# Allegro board ECBMOTORA_VER_B_Allegro.brd
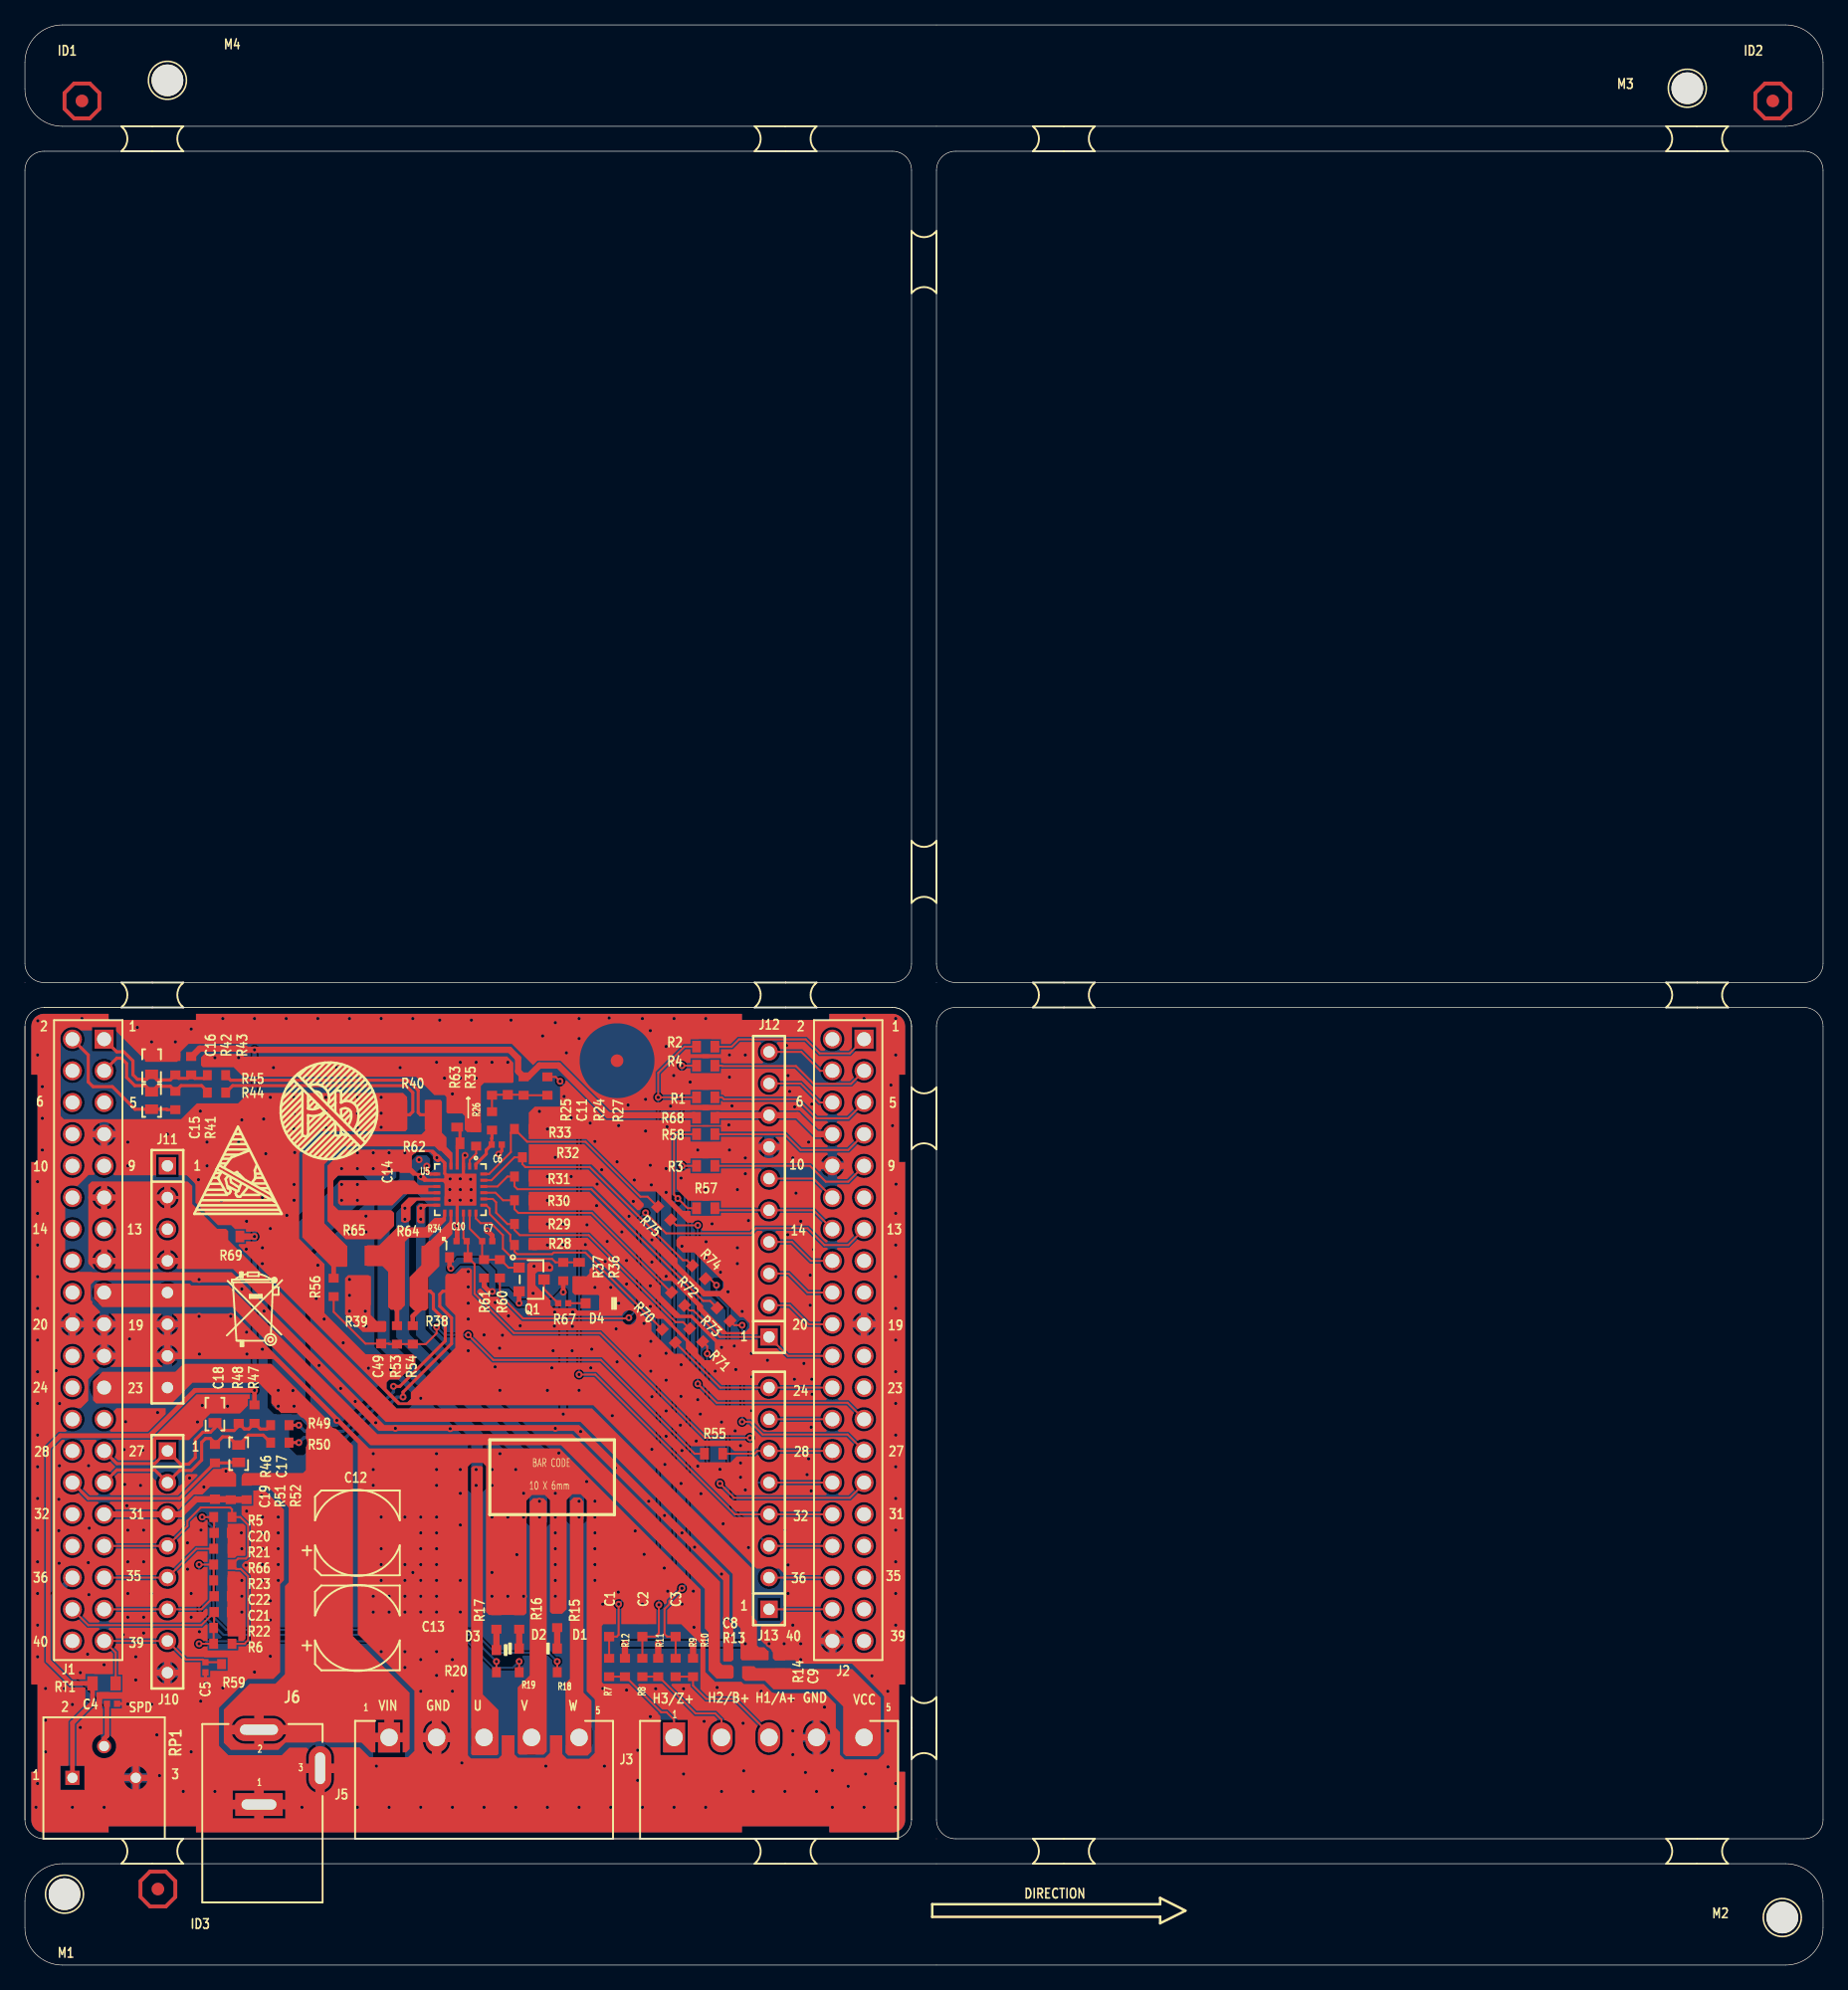
[diagram p0: board, top side]
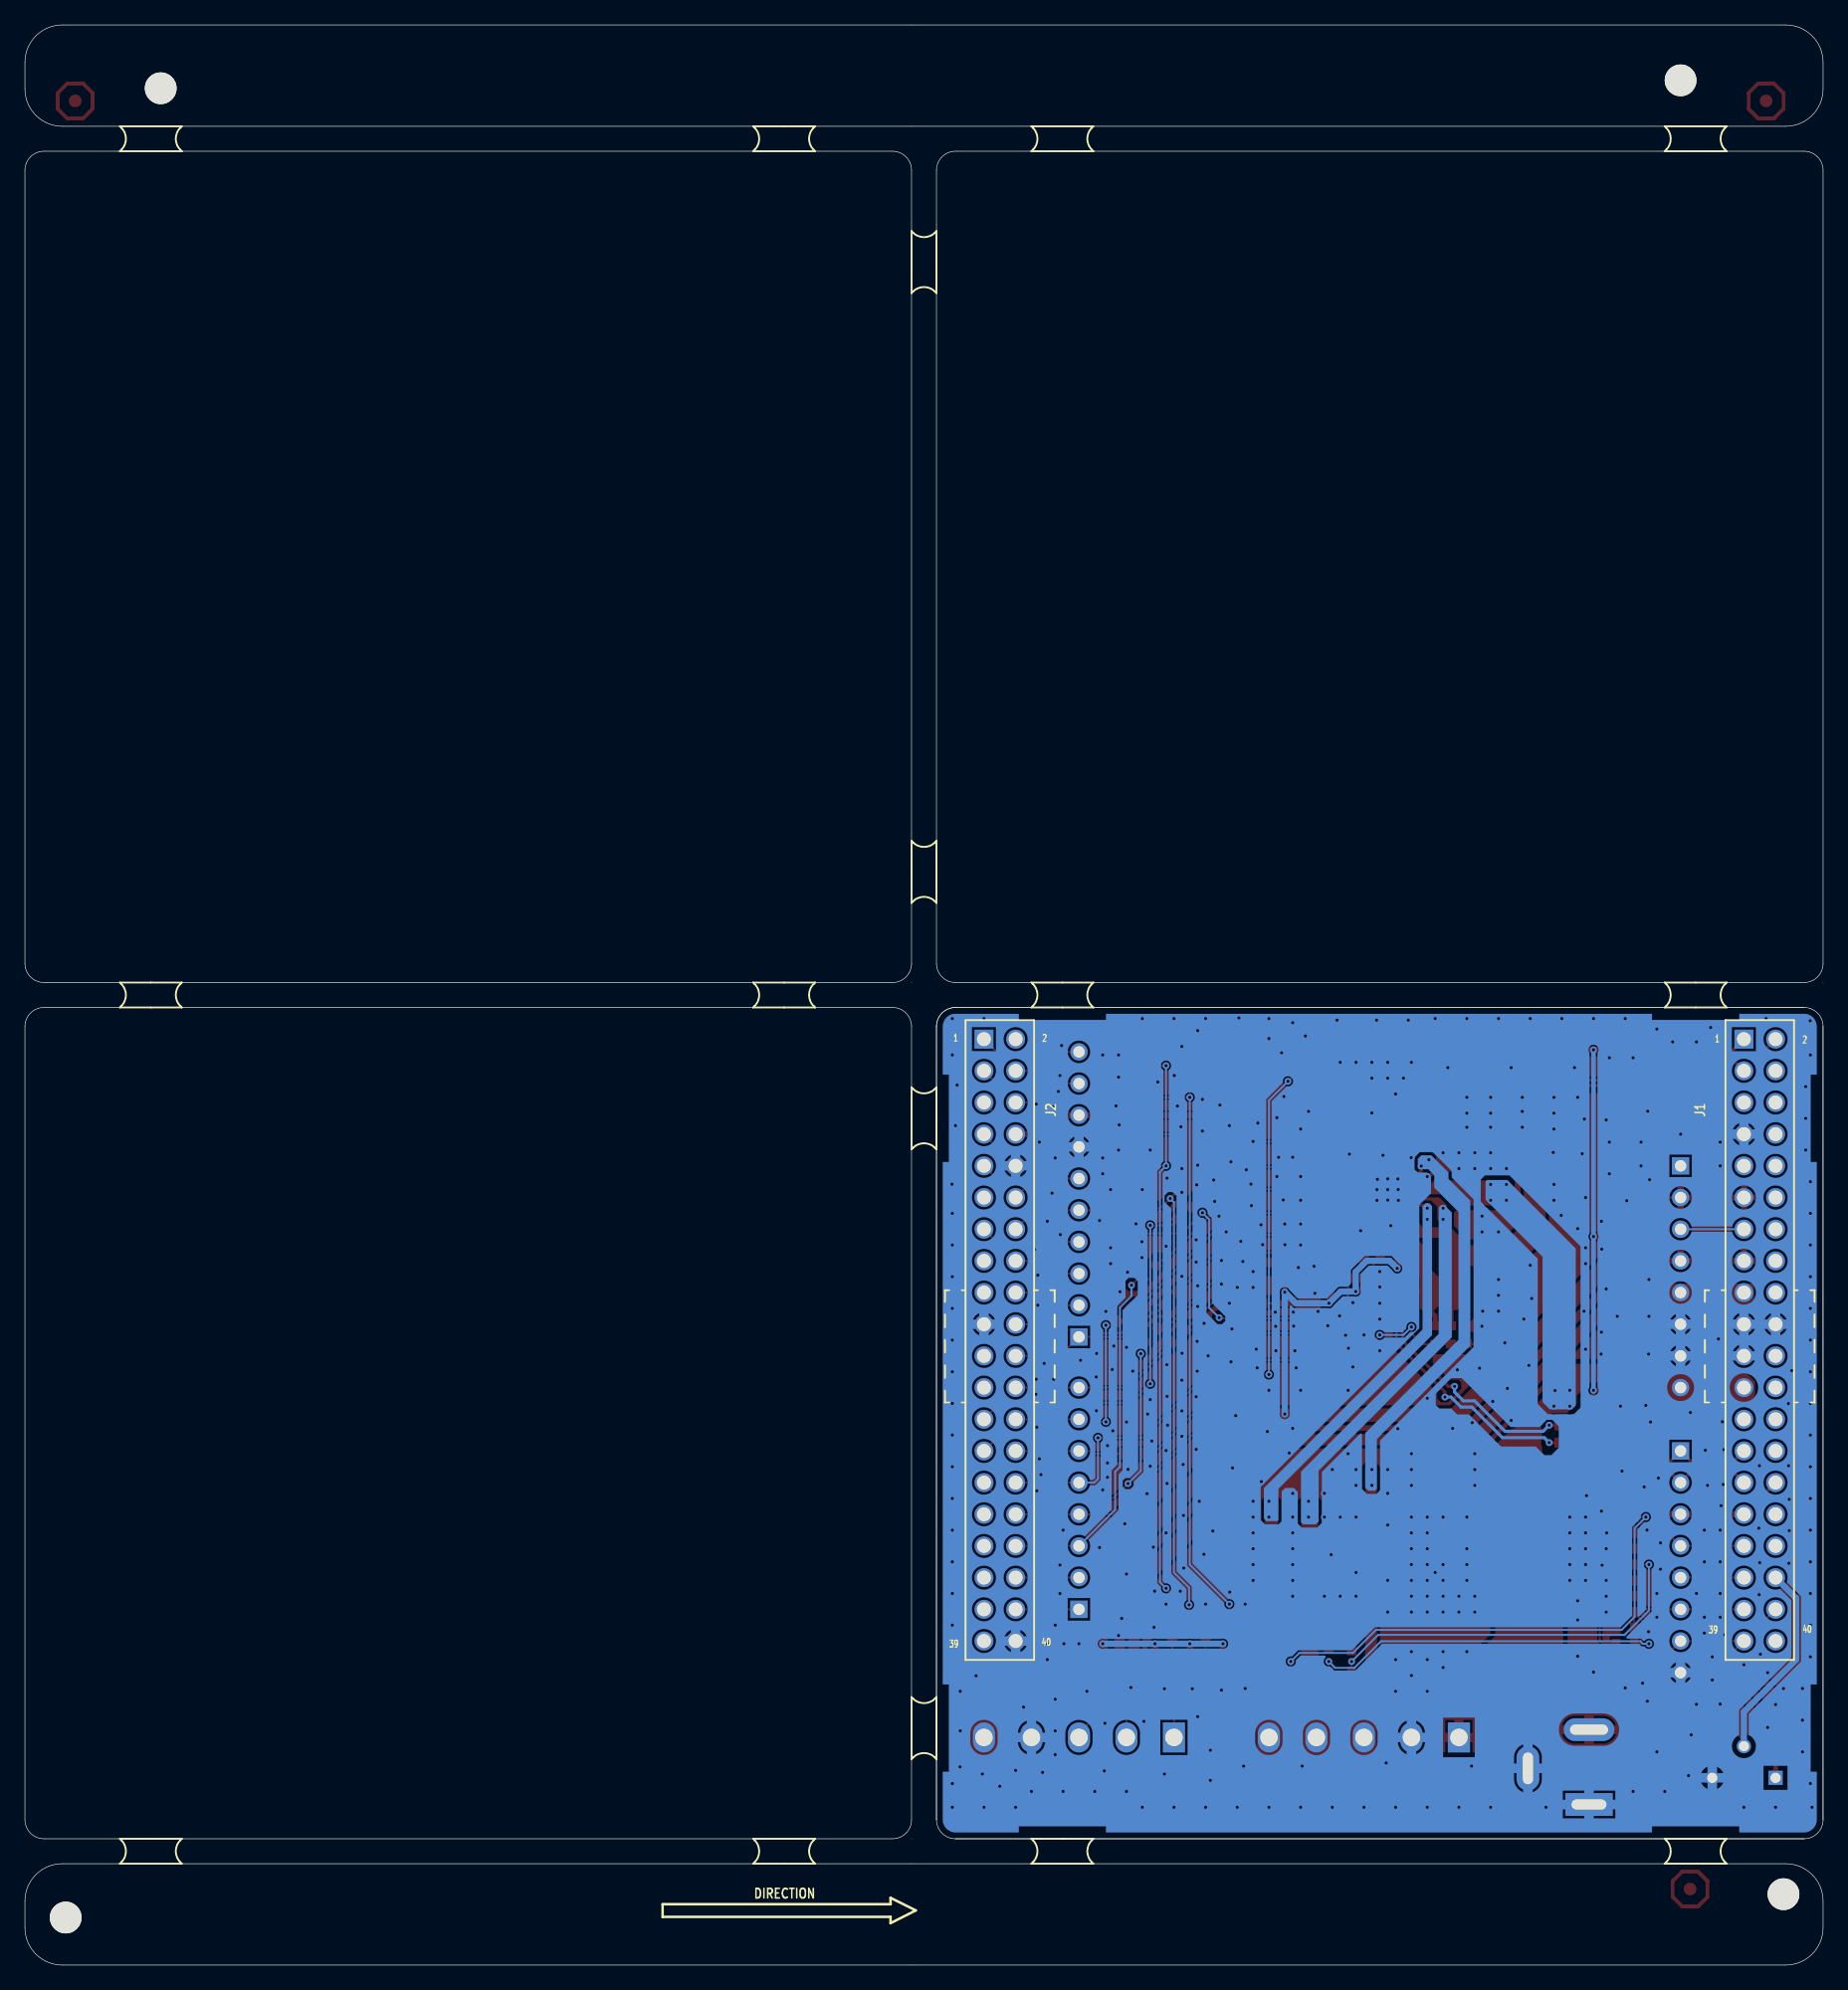
[diagram p1: board, bottom side, seen from below]

Outline 144.24 x 155.57 mm; copper layers: TOP, BOTTOM. Coordinates in mm from the lower left corner of the outline.
Outline path: 0,75.26 0,11.65 ; 0,75.26 arc(0.45,76.34) 1.52,76.79 ; 0,75.26 0,11.65 ; 0,11.65 arc(0.45,10.57) 1.52,10.13 ; 1.52,76.79 69.6,76.79 ; 1.52,76.79 69.6,76.79 ; 69.6,76.79 arc(70.67,76.34) 71.12,75.26 ; 69.6,76.79 arc(70.67,76.34) 71.12,75.26 ; 1.52,10.13 69.6,10.13 ; 1.52,10.13 69.6,10.13 ; 69.6,10.13 arc(70.67,10.57) 71.12,11.65 ; 71.12,75.26 71.12,11.65 ; 71.12,75.26 71.12,11.65 ; 0,152.58 arc(0.88,154.69) 3,155.57 141.24,155.57 arc(143.36,154.69) 144.24,152.58 144.24,150.44 arc(143.36,148.32) 141.24,147.44 3,147.44 arc(0.88,148.32) 0,150.44 0,152.58 ; 0,143.92 0,80.31 arc(0.45,79.23) 1.52,78.79 69.6,78.79 arc(70.67,79.23) 71.12,80.31 71.12,143.92 arc(70.67,145) 69.6,145.44 1.52,145.44 arc(0.45,145) 0,143.92 ; 0,5.13 arc(0.88,7.25) 3,8.13 141.24,8.13 arc(143.36,7.25) 144.24,5.13 144.24,3 arc(143.36,0.88) 141.24,0 3,0 arc(0.88,0.88) 0,3 0,5.13 ; 73.12,143.92 73.12,80.31 arc(73.57,79.23) 74.64,78.79 142.72,78.79 arc(143.79,79.23) 144.24,80.31 144.24,143.92 arc(143.79,145) 142.72,145.44 74.64,145.44 arc(73.57,145) 73.12,143.92 ; 73.12,75.26 73.12,11.65 arc(73.57,10.57) 74.64,10.13 142.72,10.13 arc(143.79,10.57) 144.24,11.65 144.24,75.26 arc(143.79,76.34) 142.72,76.79 74.64,76.79 arc(73.57,76.34) 73.12,75.26

## Design rules (mm)
net group DIFFPAIR0: nets PGA0IN_N0 PGA0IN_P0
net group DIFFPAIR1: nets PGA1IN_N3 PGA1IN_P3
net group POWER: nets 3V3 GND

## Placement (name value [footprint] x y rotation side)
C1  330pF  [SC0603-TD]  46.86 27.03 90 top
C2  330pF  [SC0603-TD]  49.53 27.03 90 top
C3  330pF  [SC0603-TD]  52.2 27.03 90 top
C4  1nF  [SC0402-PA]  6.99 20.95 0 top
C5  1nF  [SC0402-PA]  14.48 23.88 270 top
C6  1nF  [SC0402-PA]  37.85 65.79 180 top
C7  10nF  [SC0402-PB]  37.08 58.05 0 top
C8  100nF  [SC0603-TC]  57.15 24.88 0 top
C9  220nF  [SC0603-TC]  60.58 24.11 90 top
C10  1nF  [SC0402-PA]  35.03 58.05 0 top
C11  100pF  [SC0603-TC]  38.73 70.48 90 top
C12  47uF/NC  [SCAPC2-0606]  26.67 34.65 0 top
C13  47uF  [SCAPC2-0606]  26.67 27.03 0 top
C14  330nF  [SC0603-TC]  30.48 63.23 90 top
C15  47pF  [SC0603-PA]  10.16 69.33 270 top
C16  47pF/NC  [SC0603-PA]  10.16 72.12 270 top
C17  47pF  [SC0603-PA]  17.14 41 90 top
C18  47pF/NC  [SC0603-PA]  15.24 44.18 90 top
C19  220nF  [SC0603-TC]  15.24 38.05 90 top
C20  100pF/NC  [SC0603-TC]  15.88 34.65 0 top
C21  100pF/NC  [SC0603-TC]  15.88 28.3 0 top
C22  100pF/NC  [SC0603-TC]  15.88 29.57 0 top
C49  100pF  [SC0603-TC]  28.57 50.53 90 top
D1  LED_GREEN/0603  [HSD0603-LED]  43.43 25.38 180 top
D2  LED_GREEN/0603  [HSD0603-LED]  40.39 25.38 180 top
D3  LED_GREEN/0603  [HSD0603-LED]  37.08 25.26 0 top
D4  LED  [SD0603-LED-A]  45.72 53.07 0 top
ID1  PCB-MARKPOINT  [ID-BOARD]  4.57 149.48 0 top
ID2  PCB-MARKPOINT  [ID-BOARD]  140.21 149.48 0 top
ID3  PCB-MARKPOINT  [ID-BOARD]  10.67 6.1 0 top
J1  86-105-04002-1  [RHEAD0220-100-100T-D]  5.08 50.12 270 bottom
J2  86-105-04002-1  [RHEAD0220-100-100T-D]  66.04 50.12 270 bottom
J3  NC  [TB5-150S-C]  52.07 18.25 0 top
J5  NC  [TB5-150S-C]  29.21 18.25 0 top
J6  DC-006-HW  [PWC0103-M-N]  18.78 12.88 270 top
J10  NC  [SIP-8P]  11.43 32.34 270 top
J11  NC  [SIP-8P]  11.43 55.2 270 top
J12  NC  [SIP-10P]  59.69 61.8 90 top
J13  NC  [SIP-8P]  59.69 37.42 90 top
M1  RIVET-HOLE100-R2R5  [HOLE100]  3.17 5.68 0 top
M2  RIVET-HOLE100-R2R5  [HOLE100]  140.97 3.81 0 top
M3  RIVET-HOLE100-R2R5  [HOLE100]  133.35 150.5 0 top
M4  RIVET-HOLE100-R2R5  [HOLE100]  11.43 151.13 0 top
NOREF  -  [unnamed]  10.22 146.44 0 top
NOREF#2  -  [unnamed]  83.34 77.79 0 top
NOREF#3  -  [#2]  0 10.13 90 top
NOREF#4  -  [unnamed]  10.22 77.79 0 top
NOREF#5  -  [#2]  42.29 39.12 0 top
NOREF#6  -  [unnamed]  72.12 87.66 90 top
NOREF#7  -  [unnamed]  72.12 19 90 top
NOREF#8  -  [unnamed]  134.14 146.44 0 top
NOREF#9  -  [#2]  24.39 68.5 0 top
NOREF#10  -  [#2]  20.95 52.7 0 top
NOREF#11  -  [unnamed]  134.14 9.13 0 top
NOREF#12  -  [unnamed]  83.34 146.44 0 top
NOREF#13  -  [unnamed]  134.14 77.79 0 top
NOREF#14  -  [unnamed]  10.22 9.13 0 top
NOREF#15  -  [#2]  3 0 90 top
NOREF#16  -  [unnamed]  61.02 9.13 0 top
NOREF#17  -  [#2]  16.4 63.23 0 top
NOREF#18  -  [#2]  0 11.65 0 top
NOREF#19  -  [unnamed]  72.12 136.55 90 top
NOREF#20  -  [unnamed#3]  47.5 72.52 0 top
NOREF#21  -  [unnamed]  83.34 9.13 0 top
NOREF#22  -  [#2]  0 10.13 0 top
NOREF#23  -  [unnamed]  61.02 146.44 0 top
NOREF#24  -  [unnamed]  61.02 77.79 0 top
NOREF#25  -  [#2]  82.93 4.37 0 top
NOREF#26  -  [unnamed]  72.12 67.9 90 top
Q1  PMOS-GSD  [SOT23-3B]  40.64 54.97 270 top
R1  0/NC  [SR0603B]  54.61 69.58 180 top
R2  0  [SR0603B]  54.61 73.64 180 top
R3  0/NC  [SR0603B]  54.61 64.09 180 top
R4  0  [SR0603B]  54.61 72.12 180 top
R5  10k/NC  [SR0603]  15.88 35.92 180 top
R6  10k/NC  [SR0603]  15.88 25.76 180 top
R7  33  [SR0603]  46.86 23.86 270 top
R8  33  [SR0603]  49.53 23.86 270 top
R9  33  [SR0603]  52.2 23.86 270 top
R10  10k  [SR0603]  53.59 23.86 90 top
R11  10k  [SR0603]  50.8 23.86 90 top
R12  10k  [SR0603]  48.13 23.86 90 top
R13  0  [SR0603B]  57.15 23.48 0 top
R14  0/NC  [SR0603B]  59.18 24.11 270 top
R15  10k  [SR0603]  42.7 27.8 90 top
R16  10k  [SR0603]  39.65 27.67 90 top
R17  10k  [SR0603]  37.82 27.67 90 top
R18  10k  [SR0603]  43.43 23.48 0 top
R19  10k  [SR0603]  40.39 23.48 0 top
R20  10k  [SR0603]  37.08 23.48 180 top
R21  1k  [SR0603-TB]  15.88 33.38 0 top
R22  1k  [SR0603-TB]  15.88 27.03 0 top
R23  1k  [SR0603-TB]  15.88 30.84 0 top
R24  20k  [SR0603-TC]  40.01 70.48 270 top
R25  1.3k  [SR0603-TB]  37.47 70.48 90 top
R26  10k  [SR0603]  37.47 67.69 270 top
R27  3.3k  [SR0603-TC]  41.91 70.48 90 top
R28  39k  [SR0603-TB]  40.01 57.74 0 top
R29  39k  [SR0603-TB]  40.01 59.42 0 top
R30  39k  [SR0603-TB]  40.01 61.32 0 top
R31  39k  [SR0603-TB]  40.01 63.23 0 top
R32  39k  [SR0603-TB]  40.64 64.77 0 top
R33  39k  [SR0603-TB]  40.01 67.04 0 top
R34  10k  [SR0603]  34.8 56.75 0 top
R35  10k  [SR0603]  36.2 66.4 270 top
R36  0/NC  [SR0603B]  44.45 55.61 270 top
R37  39k  [SR0603-TB]  43.18 55.61 90 top
R38  200m  [SR1210-TF]  33.02 54.09 0 top
R39  200m  [SR1210-TF]  28.45 54.09 180 top
R40  200m  [SR1210-TF]  31.37 68.18 180 top
R41  10k  [SR0603]  12.06 69.33 270 top
R42  20k  [SR0603-TC]  12.06 72.12 270 top
R43  20k  [SR0603-TC]  13.34 72.12 90 top
R44  3.3k  [SR0603-TC]  15.37 69.96 180 top
R45  3.3k  [SR0603-TC]  15.37 71.36 180 top
R46  10k  [SR0603]  15.24 41 90 top
R47  20k  [SR0603-TC]  18.41 44.18 270 top
R48  20k  [SR0603-TC]  17.14 44.18 90 top
R49  3.3k  [SR0603-TC]  20.45 43.29 0 top
R50  3.3k  [SR0603-TC]  20.45 41.89 0 top
R51  12k  [SR0603-TB]  16.51 38.05 90 top
R52  180k  [SR0603-TB]  17.78 38.05 270 top
R53  3.3k  [SR0603-TC]  29.84 50.53 270 top
R54  3.3k  [SR0603-TC]  31.11 50.53 270 top
R55  100  [SR0603B]  55.24 41 0 top
R56  3.3k  [SR0603-TC]  24.77 54.34 270 top
R57  0  [SR0603B]  54.61 60.69 180 top
R58  0/NC  [SR0603B]  54.61 66.63 180 top
R59  10k  [SR0603]  16.51 24.13 0 top
R60  1k  [SR0603-TB]  38.1 55.83 270 top
R61  39k  [SR0603-TB]  36.83 55.83 90 top
R62  0/NC  [SR0603B]  34.16 65.9 180 top
R63  0  [SR0603B]  34.67 67.93 90 top
R64  0/NC  [SR1206-TD]  31.11 56.88 180 top
R65  0/NC  [SR1206-TD]  26.54 56.88 180 top
R66  10k/NC  [SR0603]  15.88 32.11 180 top
R67  330  [SR0402]  43.18 53.07 0 top
R68  0/NC  [SR0603B]  54.61 67.94 180 top
R69  0  [SR0603B]  16.51 58.42 0 top
R70  100  [SR0603]  51.65 50.44 135 top
R71  100  [SR0603]  53.84 50.51 135 top
R72  100  [SR0603]  52.39 53.42 135 top
R73  100  [SR0603]  56.04 52.17 135 top
R74  100  [SR0603]  54.06 55.56 135 top
R75  100  [SR0603]  51.28 60.28 135 top
RP1  10K  [RES3-100B-III]  3.81 15.01 180 top
RT1  47k  [SR0805-TD]  6.35 22.59 0 top
U5  STSPIN830  [MLF24B-050-0404L]  34.92 62.18 180 top

## Library data of the parts
C1-C3 = SC0603-TD
C4-C6 C10 = SC0402-PA
C7 = SC0402-PB
C8 C9 C11 C14 C19-C22 C49 = SC0603-TC
C12 C13 = SCAPC2-0606
C15-C18 = SC0603-PA
D1-D3 = HSD0603-LED
D4 = SD0603-LED-A
ID1-ID3 = ID-BOARD
J1 J2 = RHEAD0220-100-100T-D
J3 J5 = TB5-150S-C
J6 = PWC0103-M-N
J10 J11 J13 = SIP-8P
J12 = SIP-10P
M1-M4 = HOLE100
Q1 = SOT23-3B
R1-R4 R13 R14 R36 R55 R57 R58 R62 R63 R68 R69 = SR0603B
R5-R12 R15-R20 R26 R34 R35 R41 R46 R59 R66 R70-R75 = SR0603
R21-R23 R25 R28-R33 R37 R51 R52 R60 R61 = SR0603-TB
R24 R27 R42 R43 R45 R47-R50 R53 R54 R56 = SR0603-TC
R38-R40 = SR1210-TF
R44 = SR0603-TC: signal model: SR0201_33
R64 R65 = SR1206-TD
R67 = SR0402
RP1 = RES3-100B-III
RT1 = SR0805-TD
U5 = MLF24B-050-0404L

## Footprints (pads in the part's own frame, mm; a bottom-side part is the same pattern mirrored in y, then rotated)
HOLE100
  round 2.54 hole 2.54 unplated: (0,0)
HSD0603-LED
  rect 0.762x0.813 smd: 1(-0.737,0) 2(0.737,0)
ID-BOARD
  round 1.016 smd: 1(0,0)
MLF24B-050-0404L
  rect 0.254x0.559 smd: 1(-1.25,-1.879) 2(-0.75,-1.879) 3(-0.25,-1.879) 4(0.25,-1.879) 5(0.75,-1.879) 6(1.25,-1.879) 13(1.25,1.879) 14(0.75,1.879) 15(0.25,1.879) 16(-0.25,1.879) 17(-0.75,1.879) 18(-1.25,1.879)
  rect 0.559x0.254 smd: 7(1.879,-1.25) 8(1.879,-0.75) 9(1.879,-0.25) 10(1.879,0.25) 11(1.879,0.75) 12(1.879,1.25) 19(-1.879,1.25) 20(-1.879,0.75) 21(-1.879,0.25) 22(-1.879,-0.25) 23(-1.879,-0.75) 24(-1.879,-1.25)
  rect 2.54x2.54 smd: 25(0,0)
PWC0103-M-N
  rect 1.829x3.81 hole 0.813x2.794: 1(0,0)
  oval 1.829x4.064 hole 0.813x3.048: 2(-6,0)
  oval 3.556x1.829 hole 2.54x0.813: 3(-2.9,4.9)
RES3-100B-III
  rect 1.143x1.143 hole 0.813: 1(0,0)
  round 1.143 hole 0.813: 2(-2.54,-2.54) 3(-5.08,0)
RHEAD0220-100-100T-D
  rect 1.524x1.524 hole 1.118: 1(-24.13,-1.27)
  round 1.524 hole 1.118: 2(-24.13,1.27) 3(-21.59,-1.27) 4(-21.59,1.27) 5(-19.05,-1.27) 6(-19.05,1.27) 7(-16.51,-1.27) 8(-16.51,1.27) 9(-13.97,-1.27) 10(-13.97,1.27) 11(-11.43,-1.27) 12(-11.43,1.27) 13(-8.89,-1.27) 14(-8.89,1.27) 15(-6.35,-1.27) 16(-6.35,1.27) 17(-3.81,-1.27) 18(-3.81,1.27) 19(-1.27,-1.27) 20(-1.27,1.27) 21(1.27,-1.27) 22(1.27,1.27) 23(3.81,-1.27) 24(3.81,1.27) 25(6.35,-1.27) 26(6.35,1.27) 27(8.89,-1.27) 28(8.89,1.27) 29(11.43,-1.27) 30(11.43,1.27) 31(13.97,-1.27) 32(13.97,1.27) 33(16.51,-1.27) 34(16.51,1.27) 35(19.05,-1.27) 36(19.05,1.27) 37(21.59,-1.27) 38(21.59,1.27) 39(24.13,-1.27) 40(24.13,1.27)
SC0402-PA
  rect 0.508x0.508 smd: 1(-0.406,0) 2(0.406,0)
SC0402-PB
  rect 0.508x0.508 smd: 1(-0.406,0) 2(0.406,0)
SC0603-PA
  rect 0.762x1.041 smd: 1(-0.699,0) 2(0.699,0)
SC0603-TC
  rect 0.762x0.813 smd: 1(-0.699,0) 2(0.699,0)
SC0603-TD
  rect 0.762x0.813 smd: 1(-0.699,0) 2(0.699,0)
SCAPC2-0606
  rect 3.302x1.397 smd: 1(-2.651,0) 2(2.651,0)
SD0603-LED-A
  rect 0.813x0.813 smd: 1(-0.75,0) 2(0.75,0)
SIP-8P
  rect 1.397x1.397 hole 0.914: 1(-8.89,0)
  round 1.397 hole 0.914: 2(-6.35,0) 3(-3.81,0) 4(-1.27,0) 5(1.27,0) 6(3.81,0) 7(6.35,0) 8(8.89,0)
SIP-10P
  rect 1.397x1.397 hole 0.914: 1(-11.43,0)
  round 1.397 hole 0.914: 2(-8.89,0) 3(-6.35,0) 4(-3.81,0) 5(-1.27,0) 6(1.27,0) 7(3.81,0) 8(6.35,0) 9(8.89,0) 10(11.43,0)
SOT23-3B
  rect 0.813x0.914 smd: 1(-0.95,-1) 2(0.95,-1) 3(0,1)
SR0402
  rect 0.508x0.508 smd: 1(-0.406,0) 2(0.406,0)
SR0603
  rect 0.711x0.813 smd: 1(-0.737,0) 2(0.737,0)
SR0603-TB
  rect 0.711x0.813 smd: 1(-0.737,0) 2(0.737,0)
SR0603-TC
  rect 0.711x0.813 smd: 1(-0.737,0) 2(0.737,0)
SR0603B
  rect 0.711x0.94 smd: 1(-0.737,0) 2(0.737,0)
SR0805-TD
  rect 0.838x1.143 smd: 1(-0.927,0) 2(0.927,0)
SR1206-TD
  rect 1.295x1.6 smd: 1(-1.346,0) 2(1.346,0)
SR1210-TF
  rect 1.295x2.337 smd: 1(-1.346,0) 2(1.346,0)
TB5-150S-C
  rect 1.778x2.413 hole 1.397: 1(0,0)
  oval 1.778x2.413 hole 1.397: 2(3.81,0) 3(7.62,0) 4(11.43,0) 5(15.24,0)
unnamed
  round 0 smd: 1(-0.027,1.163)
unnamed#3
  round 1.016 smd: 1(0,0)

## Nets
3V3: C8.2 J1.11 J1.15 J11.2(TP-2) J11.4(TP-4) Q1.2 R10.2 R11.2 R12.2 R14.1 R34.1 R37.1 R61.1 R69.1
5V: J1.17 J11.5(TP-5) R13.1
AVDD: J2.8 J12.8(TP-8) R68.1
GND: C1.2 C2.2 C3.2 C4.2 C5.2 C6.1 C7.2 C8.1 C9.2 C10.1 C11.2 C12.2 C13.2 C14.2 C16.1 C18.2 C19.2 C20.2 C21.2 C22.2 C49.2 D4.2 J1.7 J1.19 J1.20 J1.21 J2.10 J2.19 J2.40 J3.4 J5.2 J6.1 J6.3 J10.8(TP-8) J11.6(TP-6) J11.7(TP-7) J12.7(TP-7) R15.2 R16.2 R17.2 R21.2 R22.2 R23.2 R25.2 R28.2 R29.2 R30.2 R31.2 R32.2 R33.2 R35.1 R36.2 R38.2 R39.2 R40.2 R42.1 R44.1 R48.2 R50.2 R51.2 R59.2 R63.2 RP1.3 U5.3 U5.6 U5.8 U5.15 U5.25
VBUS: C19.1 J1.31 J10.3(TP-3) R51.1 R52.2
VDDA: R24.1 R43.2 R47.1 R68.2 R69.2 RP1.1 RT1.1
VIN: C12.1 C13.1 C14.1 J1.23 J5.1 J6.2 J11.8(TP-8) R52.1 U5.9 U5.10
ACMP1IN_N3: J2.28 J13.6(TP-6) R55.2
ACMP1IN_P3: J2.32 J13.4(TP-4) R27.2
EMF_N: J1.33 J10.4(TP-4) R5.1 R6.1 R66.1
EMFU: C22.1 J1.37 J10.6(TP-6) R20.1 R23.1 R66.2
EMFV: C21.1 J1.38 R6.2 R19.1 R22.1
EMFW: C20.1 J1.35 J10.5(TP-5) R5.2 R18.1 R21.1
EN_FAULT: J2.13 R60.2
H1/A+: C3.1 R3.2 R4.2 R9.1
H2/B+: C2.1 R8.1 R57.2 R58.2
H3/Z+: C1.1 R1.2 R2.2 R7.1
INUH: J2.24 J13.8(TP-8) R70.1
INUL: J2.29 R71.1
INVH: J2.22 J12.1(TP-1) R72.1
INVL: J2.27 R73.1
INWH: J2.34 J13.3(TP-3) R74.1
INWL: J2.25 R75.1
J2_1: J2.1 R2.1
J2_3: J2.3 R4.1
J2_5: J2.5 R1.1
J2_7: J2.7 R58.1
J2_9: J2.9 R3.1
J2_14: J2.14 J12.5(TP-5) R57.1
MODE: R36.1 R37.2 U5.18
OUTU: D3.1 J5.3 R20.2 U5.7
OUTV: D2.1 J5.4 R19.2 U5.11
OUTW: D1.1 J5.5 R18.2 U5.12
PGA0IN_N0: C15.1 J1.3 R41.1 R44.2
PGA0IN_P0: C16.2 J1.1 R42.2 R43.1 R45.2
PGA0OUT: C15.2 J1.2 R41.2
PGA1IN_N3: C17.2 J1.29 J10.2(TP-2) R46.2 R50.1
PGA1IN_P3: C18.1 J1.27 J10.1(TP-1) R47.2 R48.1 R49.1
PGA1OUT1: C17.1 J1.30 R46.1
RESET: J1.13 J11.3(TP-3)
SENSEU: R40.1 R45.1 R56.1 R62.2 R65.2 U5.5
SENSEV: R39.1 R53.1 R64.2 R65.1 U5.13
SENSEW: R38.1 R49.2 R54.1 R64.1 U5.14
SNS: R62.1 R63.1 U5.4
SPD_ADJ: C4.1 J1.36 RP1.2
STBY: C10.2 J2.30 J13.5(TP-5) R34.2 U5.16
TEMP: C5.1 J1.39 J10.7(TP-7) R59.1 RT1.2
VREF: C6.2 R26.2 U5.1
$2N3239: J3.1 R7.2 R12.1
$2N3240: J3.3 R9.2 R10.1
$2N3241: J3.2 R8.2 R11.1
$2N5859: C9.1 J3.5 R13.2 R14.2
$2N8784: D1.2 R15.1
$2N8889: D2.2 R16.1
$2N9055: D3.2 R17.1
$2N21881: J2.20 J12.2(TP-2)
$2N21885: J2.12 J12.6(TP-6)
$2N21890: J2.4 J12.10(TP-10)
$2N21891: J2.6 J12.9(TP-9)
$2N21896: J2.36 J13.2(TP-2)
$2N21897: J2.38 J13.1(TP-1)
$2N21900: J2.26 J13.7(TP-7)
$2N38111: J2.16 J12.4(TP-4)
$2N38156: J2.18 J12.3(TP-3)
$3N899: C11.1 R24.2 R25.1 R26.1 R27.1
$3N2104: R35.2 U5.2
$3N2530: R28.1 R70.2 U5.19
$3N2557: R29.1 R71.2 U5.20
$3N2581: R30.1 R72.2 U5.21
$3N2582: R31.1 R73.2 U5.22
$3N2606: R33.1 R75.2 U5.24
$3N2607: R32.1 R74.2 U5.23
$3N12972: C49.1 R53.2 R54.2 R55.1 R56.2
$3N18203: C7.1 Q1.1 R60.1 R61.2 U5.17
$3N24833: Q1.3 R67.1
$3N25249: D4.1 R67.2

Pads without a net: ID1 1; ID2 1; ID3 1; J1 4 5 6 8 9 10 12 14 16 18 22 24 25 26 28 32 34 40; J2 2 11 15 17 21 23 31 33 35 37 39; J11 1; NOREF 1; NOREF#2 1; NOREF#4 1; NOREF#6 1; NOREF#7 1; NOREF#8 1; NOREF#11 1; NOREF#12 1; NOREF#13 1; NOREF#14 1; NOREF#16 1; NOREF#19 1; NOREF#20 1; NOREF#21 1; NOREF#23 1; NOREF#24 1; NOREF#26 1

## Via types
v1: diameter 0.559, hole 0.254, TOP to BOTTOM, 639 vias

## Routing (per net, layer and track width the routed paths; a pad name or vN(x,y) marks a point on that pad's centre or on a via; arc(x,y) is an arc through that point)
3V3: length 53
  TOP w0.254: 12.38,61.55 J11.2
  TOP w0.381: R37.1 v1(43.18,53.96) ; v1(34.16,55.86) 34.06,55.96 R34.1 ; v1(37.49,54.01) 37.44,54.06 37.21,54.06 36.83,54.44 R61.1 ; v1(39.64,53.07) Q1.2
  TOP w0.508: 10.48,56.47 J11.4 ; J11.4 11.43,57.42 ; J11.4 12.38,56.47 ; R10.2 v1(53.59,25.76) ; J1.15 7.37,56.47 ; J1.15 5.33,56.47 ; J1.15 6.35,57.48 ; J1.11 6.35,62.56 ; J1.11 7.37,61.55 ; J1.11 5.33,61.55 ; J1.11 6.35,60.53 ; R11.2 v1(50.8,25.76) ; 11.43,60.59 J11.2 ; J11.2 11.43,62.5 ; J11.2 10.48,61.55 ; v1(48.13,25.76) R12.2
  BOTTOM w0.508: v1(57.78,25.76) v1(53.59,25.76) v1(50.8,25.76) v1(48.13,25.76) ; v1(34.16,55.86) 34.77,56.47 36.6,56.47 37.49,55.58 v1(37.49,54.01) 38.7,54.01 v1(39.64,53.07) 42.29,53.07 v1(43.18,53.96) v1(43.18,44.18)
AVDD: length 10.1
  TOP w0.508: J2.8 63.5,66.63 61.98,68.15 J12.8 55.55,68.15 R68.1
GND: length 209.2
  TOP w0.254: v1(16.26,44.81) 16.36,44.92 R48.2 ; v1(35.56,54.38) 35.27,54.09 R38.2 34.32,54.03 33.53,54.03 33.27,53.78 33.27,52.84 34.22,51.89 34.22,49.83 30.33,45.94 v1(30.33,45.54) ; C9.2 60.58,25.45 v1(60.9,25.76) ; C4.2 8.26,20.95 ; v1(35.31,64.93) 35.17,64.8 U5.3 35.17,63.3 v1(34.92,63.04) ; R50.2 v1(21.97,41.89) ; v1(33.04,64.74) 33.25,64.74 33.68,64.32 U5.6 33.68,63.47 v1(34.11,63.04) ; C18.2 v1(14.22,44.88) ; v1(34.68,59.29) U5.15 34.68,60.99 ; R40.2 30.86,68.18 31.11,68.44 31.11,69.96 30.56,70.52 16.66,70.52 R44.1 ; v1(38,65.02) 38.25,65.28 C6.1 ; C5.2 v1(14.48,22.61) ; 33.69,62.93 U5.8 32.05,62.93 v1(31.75,63.23) ; v1(45.72,54.34) 44.98,54.34 R36.2
  TOP w0.381: v1(37.1,58.89) 37.49,58.49 C7.2 ; v1(34.68,59.29) 34.68,58.1 C10.1 ; R42.1 v1(12.06,74.02)
  TOP w0.508: J2.19 66.08,51.39 ; J2.19 68.43,51.39 ; J2.19 67.31,52.6 ; J2.19 67.31,50.18 ; J11.7 12.55,48.85 ; J11.7 11.43,50.06 ; J11.7 10.2,48.85 ; R21.2 v1(17.4,33.38) ; J1.20 2.58,51.39 ; J1.20 3.81,52.6 ; J1.20 3.81,50.18 ; J1.20 4.93,51.39 ; C2.2 v1(49.53,28.94) ; RP1.3 7.66,15.01 ; RP1.3 10.01,15.01 ; RP1.3 8.89,13.8 ; RP1.3 8.89,16.23 ; J10.8 12.55,23.45 ; J10.8 11.43,24.66 ; J10.8 10.2,23.45 ; J10.8 11.43,22.24 ; 7.47,51.39 J1.19 ; J1.19 6.35,50.18 ; J1.19 5.12,51.39 ; J1.7 5.17,66.63 ; J1.7 6.35,65.37 ; J1.7 7.63,66.63 ; J2.40 63.54,25.99 ; J2.40 64.77,27.2 ; J2.40 65.89,25.99 ; J2.40 64.77,24.78 ; 6.35,50.06 J1.21 ; J1.21 5.12,48.85 ; J1.21 7.47,48.85 ; C16.1 v1(10.16,74.02) ; J11.6 10.2,51.39 ; J11.6 12.55,51.39 ; J11.6 11.43,50.18 ; J3.4 62.27,18.25 ; J3.4 63.5,19.92 ; J3.4 63.5,16.29 ; J3.4 64.62,18.25 ; C20.2 v1(17.36,34.65) ; 65.95,64.09 J2.10 63.88,64.09 63.35,64.61 ; 58.66,65.61 J12.7 60.72,65.61
  TOP w0.762: J5.2 33.02,16.22 ; J5.2 34.6,18.25 ; J5.2 33.02,19.97 ; J5.2 31.69,18.25 ; J6.1 18.78,11.34 ; J6.1 15.84,12.88 ; J6.1 21.37,12.88 ; J6.1 18.78,14.65 ; 25.45,15.78 J6.3 ; J6.3 23.68,13.11 ; J6.3 21.61,15.78
  BOTTOM w0.254: v1(30.33,45.54) 29.84,45.54 29.04,44.74 28.17,44.74 25.72,42.29 22.37,42.29 v1(21.97,41.89)
  BOTTOM w0.762: J3.4 64.64,18.25 ; J3.4 63.5,19.71 ; J3.4 63.5,16.79 ; J3.4 62.36,18.25 ; J1.19 7.37,51.39 ; J1.19 5.33,51.39 ; J1.19 6.35,50.37 ; J1.19 6.35,52.4 ; 33.02,16.79 J5.2 ; J5.2 31.88,18.25 ; J5.2 33.02,19.71 ; J5.2 34.16,18.25 ; 8.89,14 RP1.3 ; RP1.3 8.89,16.03 ; RP1.3 9.91,15.01 ; RP1.3 7.87,15.01 ; J1.21 6.35,49.86 ; J1.21 5.33,48.85 ; J1.21 7.37,48.85 ; J1.7 6.35,67.64 ; J1.7 5.33,66.63 ; J1.7 6.35,65.61 ; J1.7 7.37,66.63 ; 66.29,51.39 J2.19 ; J2.19 68.33,51.39 ; J2.19 67.31,50.37 ; J2.19 67.31,52.4 ; 64.77,24.97 J2.40 ; J2.40 65.79,25.99 ; J2.40 64.77,27 ; J2.40 63.75,25.99 ; J12.7 58.74,65.61 ; J12.7 59.69,64.65 ; J12.7 60.64,65.61 ; J12.7 59.69,66.56 ; 3.81,50.37 J1.20 ; J1.20 3.81,52.4 ; J1.20 4.83,51.39 ; J1.20 2.79,51.39 ; J10.8 12.38,23.45 ; J10.8 10.48,23.45 ; J10.8 11.43,24.4 ; J10.8 11.43,22.49 ; 23.68,17.81 J6.3 ; J6.3 23.68,13.74 ; J6.3 22.51,15.78 ; J6.3 24.84,15.78 ; J6.1 18.78,14.04 ; J6.1 20.93,12.88 ; J6.1 16.62,12.88 ; J6.1 18.78,11.71 ; J11.6 11.43,52.34 ; J11.6 11.43,50.43 ; J11.6 12.38,51.39 ; J11.6 10.48,51.39 ; J2.10 65.79,64.09 ; J2.10 64.77,63.07 ; J2.10 64.77,65.1 ; J2.10 63.75,64.09 ; J11.7 11.43,49.8 ; J11.7 10.48,48.85 ; J11.7 12.38,48.85 ; J11.7 11.43,47.89
  vias: v1(0.89,12.65) v1(1.03,75.72) v1(1.02,72.98) v1(1.02,62.82) v1(1.02,60.28) v1(1.02,57.74) v1(1.02,55.2) v1(1.02,52.66) v1(1.02,50.12) v1(1.02,47.58) v1(1.02,45.04) v1(1.02,42.5) v1(1.02,39.96) v1(1.02,37.42) v1(1.02,34.88) v1(1.02,32.34) v1(1.02,29.8) v1(1.02,27.26) v1(1.02,24.72) v1(1.02,14.56) v1(1.4,70.44) v1(1.4,67.9) v1(1.4,65.36) v1(1.65,22.18) v1(1.65,19.64) v1(1.65,17.1) v1(2.5,47.67) v1(2.72,37.35) v1(2.72,34.83) v1(2.74,32.22) v1(2.78,45.02) v1(2.77,40.04) v1(3.17,22.18) v1(3.81,20.89) v1(3.81,12.65) v1(4.45,23.45) v1(4.45,19.05) v1(4.57,75.9) v1(5.03,24.93) v1(5.11,40.04) v1(5.08,32.27) v1(5.13,29.7) v1(5.16,35.04) v1(6.35,24.08) v1(6.35,12.65) v1(7.87,26.49) v1(7.95,41.33) v1(8,38.54) v1(8.08,43.57) v1(8.18,36.84) v1(8.26,65.99) v1(8.26,64.09) v1(8.26,34.88) v1(8.26,32.34) v1(8.26,29.8) v1(8.26,27.89) v1(8.26,20.93) v1(8.39,50.21) v1(8.89,24.72) v1(8.89,22.86) v1(9.02,75.18) v1(9.27,38.46) v1(9.45,41.28) v1(9.53,34.88) v1(9.53,32.34) v1(9.53,27.89) v1(9.53,26.62) v1(10.16,29.8) v1(10.16,20.91) v1(10.64,44.31) v1(10.58,18.46) v1(10.79,15.19) v1(11.43,66.63) v1(12.7,13.92) v1(13.04,33.85) v1(13.04,31.74) v1(13.21,39.05) v1(13.34,75.06) v1(13.34,29.8) v1(13.34,27.89) v1(13.34,17.1) v1(13.84,43.54) v1(13.92,62.98) v1(13.97,54.97) v1(13.97,52.02) v1(14,48.99) v1(14,26.73) v1(14.07,68.47) v1(14.12,34.88) v1(14.1,21.16) v1(14.35,38.34) v1(14.61,65.99) v1(14.61,64.09) v1(15.24,72.75) v1(15.24,13.92) v1(15.75,61.29) v1(15.88,75.9) v1(15.88,22.23) v1(16.13,39.61) v1(16.51,52.02) v1(17.14,72.75) v1(17.14,65.99) v1(17.14,63.45) v1(17.4,67.77) v1(17.4,54.21) v1(17.4,30.84) v1(17.4,29.57) v1(17.4,28.3) v1(17.73,32.06) v1(17.78,59.64) v1(17.75,57.4) v1(17.78,50.75) v1(17.81,48.99) v1(17.78,36.4) v1(18.41,75.9) v1(18.41,23.49) v1(18.97,37.64) v1(19.15,67.84) v1(19.05,61.55) v1(19.05,57.51) v1(19.05,56.24) v1(19.05,49.38) v1(19.05,35.92) v1(19.05,34.65) v1(19.05,33.38) v1(19.05,32.11) v1(19.05,30.84) v1(19.18,52.43) v1(19.32,65.06) v1(19.68,69.58) v1(19.68,59.05) v1(19.68,29.21) v1(19.68,27.67) v1(19.68,24.77) v1(19.94,71.96) v1(20.32,35.92) v1(20.32,34.65) v1(20.32,33.38) v1(20.32,32.11) v1(20.32,30.84) v1(20.95,75.9) v1(21.01,60.12) v1(21.59,69.58) v1(21.59,68.31) v1(21.59,67.04) v1(21.64,65.16) v1(21.59,62.59) v1(21.59,61.32) v1(22.23,12.65) v1(23.37,53.45) v1(23.5,75.9) v1(23.5,56.12) v1(23.6,48.08) v1(24,51.8) v1(24.13,69.58) v1(24.13,68.45) v1(24.13,67.18) v1(25.02,71.96) v1(25.02,43.67) v1(25.32,46.24) v1(25.4,63.86) v1(25.53,49.89) v1(26.04,75.9) v1(26.04,58.78) v1(26.04,54.97) v1(26.04,53.7) v1(26.04,52.43) v1(26.49,45.2) v1(26.67,69.58) v1(26.67,68.31) v1(26.67,67.18) v1(26.67,65.13) v1(26.67,63.86) v1(26.67,12.65) v1(27.3,52.43) v1(27.36,60.05) v1(27.36,58.78) v1(27.37,51.23) v1(27.56,47.86) v1(27.94,65.13) v1(27.94,63.86) v1(27.94,41) v1(27.94,39.73) v1(27.94,38.46) v1(27.94,29.57) v1(27.94,28.3) v1(28.14,43.49) v1(28.19,15.95) v1(28.57,75.9) v1(28.57,69.58) v1(28.57,68.31) v1(28.57,67.18) v1(28.57,35.92) v1(28.57,33.38) v1(28.57,32.11) v1(28.57,30.84) v1(28.57,25.13) v1(29.21,65.13) v1(29.21,63.86) v1(29.21,29.57) v1(29.21,28.3) v1(29.21,12.65) v1(29.34,47.74) v1(29.72,43.04) v1(30.1,71.96) v1(30.48,65.13) v1(30.48,35.92) v1(30.48,32.11) v1(30.48,30.84) v1(30.48,29.57) v1(30.48,28.3) v1(30.48,25.13) v1(30.48,23.86) v1(31.11,75.9) v1(31.11,31.48) v1(31.75,45.45) v1(31.75,35.92) v1(31.75,34.65) v1(31.75,33.38) v1(31.75,32.11) v1(31.75,30.84) v1(31.75,29.57) v1(31.75,28.3) v1(31.75,24.49) v1(31.75,21.95) v1(31.75,12.65) v1(33.02,72.39) v1(33.02,41) v1(33.02,39.73) v1(33.02,38.46) v1(33.02,35.92) v1(33.02,34.65) v1(33.02,33.38) v1(33.02,32.11) v1(33.02,30.84) v1(33.02,29.57) v1(33.02,28.3) v1(33.02,25.13) v1(33.02,23.22) v1(33.27,75.77) v1(33.66,71.12) v1(34.09,62.19) v1(34.07,61.32) v1(34.11,43.01) v1(34.29,69.85) v1(34.29,24.49) v1(34.29,21.95) v1(34.29,12.65) v1(34.92,72.39) v1(34.92,71.12) v1(34.92,62.18) v1(34.92,61.34) v1(34.92,39.73) v1(34.92,37.83) v1(34.92,35.29) v1(34.92,30.84) v1(34.92,28.3) v1(35.05,16.21) v1(35.56,55.61) v1(35.56,53.07) v1(35.56,51.8) v1(35.56,49.26) v1(35.81,75.77) v1(35.75,63.01) v1(35.79,62.18) v1(35.79,61.32) v1(36.2,72.39) v1(36.2,71.12) v1(36.2,68.33) v1(36.83,50.53) v1(36.83,12.65) v1(37.47,72.39) v1(37.47,39.73) v1(37.47,38.46) v1(37.47,35.92) v1(37.47,31.48) v1(37.47,29.57) v1(37.72,53.12) v1(37.72,47.96) v1(38.07,49.46) v1(38.1,46.08) v1(38.1,41) v1(38.3,50.5) v1(38.73,72.39) v1(38.73,35.92) v1(38.73,29.57) v1(38.79,52.05) v1(38.99,75.77) v1(39.37,39.73) v1(39.37,12.65) v1(39.46,32.91) v1(39.73,51.27) v1(40.01,37.83) v1(40.01,35.92) v1(40.01,29.57) v1(40.51,52.41) v1(40.84,56.03) v1(40.76,53.87) v1(41.27,68.45) v1(41.53,74.5) v1(41.78,15.95) v1(41.91,67.04) v1(41.91,63.23) v1(41.91,61.32) v1(41.91,59.42) v1(41.91,57.74) v1(41.91,46.08) v1(41.91,12.65) v1(42.09,55.93) v1(42.27,47.89) v1(42.37,49.26) v1(42.55,75.56) v1(42.55,64.77) v1(42.49,52.36) v1(42.47,51.24) v1(42.55,43.04) v1(42.55,37.83) v1(42.55,35.92) v1(42.55,34.65) v1(42.55,33.38) v1(42.55,32.11) v1(42.55,30.84) v1(42.55,29.57) v1(42.82,41.06) v1(43.18,59.42) v1(43.17,57.76) v1(43.25,69.65) v1(43.31,61.35) v1(43.43,73.15) v1(43.68,64.77) v1(43.81,67.94) v1(43.81,63.23) v1(43.94,52.36) v1(43.92,51.22) v1(43.89,49.26) v1(44.45,75.9) v1(44.45,74.3) v1(44.45,46.08) v1(44.45,12.65) v1(44.58,42.78) v1(44.96,57.77) v1(45.09,59.36) v1(45.06,38.77) v1(45.34,67.52) v1(45.39,47.89) v1(45.47,49.39) v1(45.72,66.04) v1(45.72,55.61) v1(45.72,37.19) v1(45.72,35.92) v1(45.72,34.65) v1(45.72,33.38) v1(45.72,32.11) v1(45.72,30.84) v1(45.9,62.62) v1(45.85,60.9) v1(46.27,63.78) v1(46.35,28.94) v1(46.35,22.18) v1(46.54,56.42) v1(46.48,15.95) v1(46.71,58.03) v1(46.86,75.95) v1(46.99,54.34) v1(46.99,12.65) v1(47.12,44.05) v1(47.42,51.01) v1(47.37,39.86) v1(47.5,64.41) v1(47.5,48.37) v1(47.62,67.31) v1(47.62,53.07) v1(47.6,29.9) v1(47.88,58.78) v1(48.26,56.5) v1(48.26,54.61) v1(48.26,22.05) v1(48.39,68.96) v1(48.46,60.05) v1(48.81,61.24) v1(48.88,62.95) v1(48.95,34.81) v1(49.15,17.22) v1(49.15,14.81) v1(49.33,48.85) v1(49.53,75.9) v1(49.53,12.65) v1(49.66,51.46) v1(49.67,32.93) v1(49.78,69.42) v1(49.78,66.88) v1(50.04,37.19) v1(50.16,74.93) v1(50.16,64.14) v1(50.25,62.56) v1(50.16,54.47) v1(50.16,52.82) v1(50.21,50.01) v1(50.2,47.62) v1(50.16,19.92) v1(50.29,58.15) v1(50.29,56.37) v1(50.29,45.58) v1(50.29,41.35) v1(50.6,22.16) v1(51.33,40.14) v1(51.31,36.05) v1(51.29,31.83) v1(51.44,73.66) v1(51.44,63.86) v1(51.44,61.96) v1(51.44,55.23) v1(51.43,49.06) v1(51.44,46.9) v1(51.44,44.43) v1(51.44,42.4) v1(51.51,67.22) v1(51.56,29.98) v1(51.79,68.88) v1(52.04,71.33) v1(52.07,75.9) v1(52.07,12.65) v1(52.63,63.1) v1(52.64,48.14) v1(52.62,45.6) v1(52.58,43.29) v1(52.63,38.62) v1(52.7,57.64) v1(52.7,41.26) v1(52.7,34.65) v1(52.7,28.94) v1(52.83,22.16) v1(52.83,15.32) v1(53.36,70.81) v1(53.62,29.98) v1(53.72,33.51) v1(53.67,27.09) v1(53.85,42.02) v1(53.98,65.36) v1(53.98,45.34) v1(53.98,40) v1(54.18,44.18) v1(54.23,37.8) v1(54.48,19.54) v1(54.61,75.9) v1(54.61,62.18) v1(54.64,58) v1(54.64,56.73) v1(54.61,12.65) v1(55.12,59.44) v1(55.37,47.62) v1(55.52,22.26) v1(55.79,55.56) v1(55.75,39.75) v1(55.88,49.53) v1(55.88,43.54) v1(55.88,31.35) v1(55.88,13.92) v1(56.01,35.38) v1(56.26,27.8) v1(56.4,53.99) v1(56.52,72.98) v1(56.52,71.2) v1(56.46,67.37) v1(56.52,65.36) v1(56.52,26.42) v1(56.72,68.89) v1(56.9,49.64) v1(57.02,47.75) v1(56.97,42.84) v1(57.15,62.18) v1(57.15,57.51) v1(57.15,56.24) v1(57.4,41.66) v1(57.4,40.26) v1(57.4,39.12) v1(57.53,52.41) v1(57.61,19.39) v1(57.66,15.57) v1(57.78,72.98) v1(57.78,64.72) v1(57.78,63.45) v1(57.78,38.1) v1(58.04,59.7) v1(58.04,33.48) v1(58.27,49.04) v1(58.31,47.16) v1(58.29,44.45) v1(58.42,13.92) v1(59.05,21.95) v1(59.56,48.5) v1(59.69,25.76) v1(60.96,34.88) v1(60.96,13.92) v1(61.09,73.74) v1(61.21,71.33) v1(61.19,58.57) v1(61.21,32.08) v1(61.21,29.8) v1(61.34,70.06) v1(61.59,64.72) v1(61.59,27.26) v1(61.59,21.32) v1(61.59,18.78) v1(61.59,16.87) v1(61.74,68.82) v1(61.72,46.97) v1(61.85,61.9) v1(62.23,59.64) v1(62.23,25.76) v1(62.23,24.49) v1(62.48,48.24) v1(62.61,15.45) v1(62.74,39.32) v1(62.87,65.99) v1(62.87,40.59) v1(62.99,55.32) v1(62.99,52.91) v1(63.12,69.04) v1(63.12,46.97) v1(63.14,45.77) v1(63.07,43.13) v1(63.07,38.02) v1(63.27,57.38) v1(63.5,13.92) v1(64.14,20.68) v1(64.77,15.6) v1(64.77,12.65) v1(66.04,14.33) v1(67.31,75.9) v1(67.31,12.65) v1(67.44,15.32) v1(67.94,23.19) v1(69.22,21.95) v1(69.22,18.78) v1(69.23,15.89) v1(69.47,70.56) v1(69.6,67.31) v1(69.85,75.9) v1(69.85,72.98) v1(69.85,60.28) v1(69.85,57.74) v1(69.85,55.2) v1(69.85,52.66) v1(69.85,50.12) v1(69.85,47.58) v1(69.85,45.04) v1(69.85,42.5) v1(69.85,39.96) v1(69.85,37.42) v1(69.85,34.88) v1(69.85,32.34) v1(69.85,29.8) v1(69.85,27.26) v1(69.85,14.56) v1(69.85,12.65) v1(69.88,62.61)
VBUS: length 11.9
  TOP w0.508: J1.31 J10.3 12.51,36.15 13.72,37.35 C19.1 16.47,37.35 R51.1 R52.2
VDDA: length 122.2
  TOP w0.381: R47.1 v1(18.41,46.08) 13.64,46.08 10,42.45 2.84,42.45 1.86,41.47 1.86,24.41 3.68,22.59 RT1.1 5.42,21.03 3.81,19.41 RP1.1
  TOP w0.508: R68.2 53.67,68.15 46.79,68.15 42.8,72.14 41.27,72.14 40.36,71.22 R24.1 39.56,71.67 39.56,72.71 38.88,73.39 v1(18.41,73.39) 17.75,73.39 17.65,73.49 14.02,73.49 13.39,72.86 R43.2 ; R69.2 v1(18.41,58.42)
  BOTTOM w0.381: v1(18.41,73.39) v1(18.41,58.42) v1(18.41,46.08)
VIN: length 11.2
  TOP w0.762: 30.43,18.25 J5.1 ; J5.1 27.99,18.25 ; J5.1 29.21,19.79 ; 18.78,17.63 J6.2 ; J6.2 21.14,18.88 ; J6.2 18.78,20.12 ; J6.2 16.41,18.88
  vias: v1(20.32,46.08) v1(20.32,44.81) v1(21.5,46.07) v1(21.59,44.81) v1(25.4,62.59) v1(25.4,61.32) v1(26.67,62.59) v1(26.67,61.32)
ACMP1IN_N3: length 8.9
  TOP w0.165: J2.28 J13.6 58.75,41.23 58.53,41 R55.2
ACMP1IN_P3: length 50.3
  TOP w0.165: J2.32 J13.4 56.95,36.15 45.75,47.35 v1(44.45,47.35) ; R27.2 42.57,71.22 v1(42.93,70.87)
  BOTTOM w0.165: v1(44.45,47.35) 44.45,69.34 v1(42.93,70.87)
EMF_N: length 26.3
  TOP w0.165: J1.33 J10.4 13.03,35.21 13.03,35.62 14.1,36.69 16.47,36.69 16.61,36.54 R5.1 17.27,35.92 17.91,35.29 17.91,32.77 17.73,32.6 17.09,32.6 R66.1 16.97,31.76 17.32,31.76 17.91,31.17 17.91,26.06 17.61,25.76 R6.1
EMFU: length 43.1
  TOP w0.165: J1.37 J10.6 14.15,28.53 15.18,29.55 C22.1 15.14,29.61 R23.1 R66.2 v1(13.97,32.11) ; R20.1 v1(37.82,24.34)
  BOTTOM w0.165: v1(13.97,32.11) 13.97,28.43 15.93,26.48 35.69,26.48 v1(37.82,24.34)
EMFV: length 43.8
  TOP w0.165: 15.18,28.28 14.15,27.26 5.08,27.26 J1.38 ; 15.18,28.28 C21.1 ; 15.18,28.28 15.18,27.07 R22.1 R6.2 v1(13.97,25.76) ; R19.1 v1(39.65,24.34)
  BOTTOM w0.165: v1(13.97,25.76) 14.46,25.76 14.66,25.97 35.46,25.97 37.59,23.83 39.14,23.83 v1(39.65,24.34)
EMFW: length 51.5
  TOP w0.165: R18.1 v1(42.7,24.34) ; J1.35 J10.5 13.75,33.38 R21.1 15.18,33.42 C20.1 15.18,35.89 R5.2 v1(14.22,35.92)
  BOTTOM w0.165: v1(42.7,24.34) 42.01,25.03 37.72,25.03 35.86,26.88 16.15,26.88 15.11,27.92 15.11,35.03 v1(14.22,35.92)
EN_FAULT: length 41
  TOP w0.165: v1(49.78,60.33) 51.44,58.67 58.23,58.67 58.65,59.09 62.78,59.09 64.14,57.74 66.04,57.74 J2.13 ; R60.2 38.1,53.7 39.95,51.85 48.39,51.85 v1(48.44,51.91)
  BOTTOM w0.165: v1(49.78,60.33) 49.24,59.78 49.24,52.71 v1(48.44,51.91)
H1/A+: length 51.6
  TOP w0.165: R3.2 v1(52.7,64.09) ; R9.1 C3.1 51.51,26.34 51.31,26.54 51.31,28.56 51.69,28.94 51.69,29.19 v1(52.7,30.21) ; R4.2 v1(52.7,72.12)
  BOTTOM w0.165: v1(52.7,30.21) 53.19,30.7 53.19,60.48 53.19,63.6 v1(52.7,64.09) v1(52.7,72.12)
H2/B+: length 47.4
  TOP w0.165: R8.1 C2.1 50.58,26.34 50.85,26.61 v1(50.85,28.89) ; R57.2 53.15,60.69 v1(52.37,61.47) 52.07,61.77 52.07,66.4 52.29,66.63 R58.2
  BOTTOM w0.165: v1(50.85,28.89) 50.85,30.26 52.07,31.48 52.07,61.17 v1(52.37,61.47)
H3/Z+: length 56
  TOP w0.165: R2.2 52.9,73.64 50.8,71.54 v1(50.8,69.58) R1.2 ; R7.1 C1.1 47.48,26.34 47.62,26.48 v1(47.62,28.94)
  BOTTOM w0.165: v1(50.8,69.58) 50.8,32.11 v1(47.62,28.94)
INUH: length 14.1
  TOP w0.165: J2.24 J13.8 55.78,46.31 R70.1
INUL: length 24.5
  TOP w0.165: v1(55.75,38.61) 56.9,37.47 66.17,37.47 67.31,38.61 J2.29 ; R71.1 54.73,49.62 v1(54.73,49.02)
  BOTTOM w0.165: v1(55.75,38.61) 54.73,39.63 v1(54.73,49.02)
INVH: length 13.5
  TOP w0.165: J2.22 61.21,48.85 J12.1 55.74,50.37 53.63,52.48 53.32,52.48 R72.1
INVL: length 19.6
  TOP w0.165: v1(57.53,43.56) 58.17,43.56 59.18,42.55 65.99,42.55 J2.27 ; R73.1 56.91,51.31 v1(57.53,51.31)
  BOTTOM w0.165: v1(57.53,43.56) v1(57.53,51.31)
INWH: length 28.8
  TOP w0.165: J13.3 J2.34 ; v1(55.47,54.51) 54.95,55.04 R74.1
  BOTTOM w0.165: J13.3 56.79,36.51 56.79,39.56 56.4,39.95 56.4,52.72 55.47,53.65 v1(55.47,54.51)
INWL: length 29.6
  TOP w0.165: J2.25 65.99,45.08 55.5,45.08 v1(53.98,46.61) ; R75.1 52.24,59.32 v1(53.98,59.32)
  BOTTOM w0.165: v1(53.98,59.32) v1(53.98,46.61)
J2_1: length 13.1
  TOP w0.165: R2.1 56.69,73.64 57.28,74.23 62.63,74.23 63.75,73.1 66.17,73.1 J2.1
J2_3: length 13
  TOP w0.165: R4.1 55.91,72.12 55.94,72.09 61.85,72.09 63.28,70.66 66.26,70.66 J2.3
J2_5: length 13.2
  TOP w0.165: R1.1 55.91,69.58 56.06,69.43 61.97,69.43 63.5,67.9 66.04,67.9 J2.5
J2_7: length 13
  TOP w0.165: J2.7 66.04,65.36 62.23,65.36 60.96,66.63 R58.1
J2_9: length 13
  TOP w0.165: R3.1 62.97,64.09 64.24,62.82 66.04,62.82 J2.9
J2_14: length 10.1
  TOP w0.165: J2.14 63.25,60.53 J12.5 55.51,60.53 R57.1
MODE: length 10.8
  TOP w0.165: R36.1 R37.2 42.56,56.35 42.28,56.63 39.16,56.63 38.34,57.44 38.34,58.53 37.38,59.49 36.55,59.49 36.17,59.87 U5.18
OUTU: length 1.3
  TOP w0.254: v1(32.23,64.07) 32.23,63.71 32.51,63.43 U5.7
  vias: v1(31.62,64.58) v1(36.2,39.73) v1(36.2,38.46)
OUTV:
  vias: v1(30.48,60.69) v1(30.48,59.8) v1(41.27,37.19) v1(41.27,35.92)
OUTW:
  vias: v1(31.75,60.69) v1(31.75,59.8) v1(44.45,37.19) v1(44.45,35.92)
PGA0IN_N0: length 11.3
  TOP w0.254: R44.2 14.63,70.06 14.17,70.52 12.52,70.52 R41.1 12.06,70.07 11.66,70.47 10.6,70.47 C15.1 9.66,70.52 8.81,70.52 8.15,71.18 8.15,72.29 7.73,72.72 7.37,72.72 J1.3
PGA0IN_P0: length 11.2
  TOP w0.254: R45.2 14.38,71.1 13.61,71.1 R43.1 13.06,71.1 12.34,71.1 R42.2 11.66,70.98 10.6,70.98 C16.2 9.77,71.03 9.02,71.03 8.66,71.39 8.66,72.5 7.94,73.23 7.37,73.23 J1.1
PGA0OUT: length 11.9
  TOP w0.254: R41.2 11.4,68.59 11.37,68.63 C15.2 8.83,68.63 7.02,70.44 5.46,70.44 5.08,70.82 5.08,72.98 J1.2
PGA1IN_N3: length 17.9
  TOP w0.254: R50.1 19.11,42.49 17.94,42.49 C17.2 17.01,41.7 16.35,42.36 15.86,42.36 R46.2 15.24,41.87 14.88,42.22 14.49,42.22 14.17,41.91 14.17,40.49 13.35,39.66 12.41,39.66 J10.2 10.41,39.7 7.37,39.7 J1.29
PGA1IN_P3: length 18.4
  TOP w0.254: R49.1 19.4,42.98 18.88,42.98 R47.2 17.96,42.99 17.6,42.99 R48.1 17.14,43.24 16.77,42.86 15.86,42.86 C18.1 15.24,43.09 14.88,42.73 14.27,42.73 13.67,42.12 13.67,40.7 13.14,40.17 12.49,40.17 J10.1 10.41,40.21 7.37,40.21 J1.27
PGA1OUT1: length 15.1
  TOP w0.254: J1.30 5.08,37.42 12.39,37.42 R46.1 16.38,40.27 16.41,40.31 C17.1
RESET: length 5.1
  BOTTOM w0.165: J1.13 J11.3
SENSEU: length 21
  TOP w0.254: R45.1 16.51,70.95 30.74,70.95 31.55,70.14 31.55,68.36 31.72,68.18 R40.1
  TOP w0.381: R65.2 24.77,56.45 R56.1
SENSEV: length 2.8
  TOP w0.381: R53.1 29.84,52.55 29.79,52.6 R39.1
SENSEW: length 24.4
  TOP w0.254: R49.2 v1(21.97,43.29) ; R38.1 31.72,54.03 32.51,54.03 32.77,53.78 32.77,52.63 33.72,51.68 33.72,50.04 30.08,46.4 v1(29.56,46.4)
  TOP w0.381: R54.1 31.11,52.04 31.67,52.6 R38.1
  BOTTOM w0.254: v1(21.97,43.29) 22.46,42.8 25.51,42.8 27.96,45.25 28.86,45.25 29.56,45.95 v1(29.56,46.4)
SNS: length 3.3
  TOP w0.254: R63.1 34.9,66.96 R62.1 34.68,65.67 U5.4
SPD_ADJ: length 19.4
  TOP w0.381: C4.1 6.58,18.38 6.35,18.15 RP1.2
  BOTTOM w0.508: J1.36 2.16,29.42 2.16,24.49 6.35,20.3 RP1.2
STBY: length 43.7
  TOP w0.165: U5.16 35.17,58.31 C10.2 35.53,57.95 R34.2 36.07,56.22 36.07,53.83 39.22,50.68 46.15,50.68 54.56,42.27 v1(58.17,42.27) ; J2.30 J13.5
  BOTTOM w0.165: v1(58.17,42.27) 58.17,38.99 58.47,38.69 J13.5
TEMP: length 14
  TOP w0.165: RT1.2 7.28,25.06 J1.39 J10.7 12.92,24.49 14.27,24.49 C5.1 15.62,24.28 R59.1
VREF: length 3.4
  TOP w0.254: U5.1 36.17,64.21 37.01,65.04 37.01,65.35 C6.2 37.44,66.29 37.47,66.32 R26.2
$2N3239: length 8.1
  TOP w0.165: J3.1 52.07,19.67 51.47,20.27 51.03,20.27 48.18,23.12 R12.1 R7.2
$2N3240: length 10.1
  TOP w0.165: R9.2 R10.1 53.59,22.41 54.66,21.34 56.92,21.34 59.69,18.57 J3.3
$2N3241: length 9.2
  TOP w0.165: J3.2 55.88,19.67 55.37,20.18 53.8,20.18 50.85,23.12 R11.1 R8.2
$2N8784: length 1.7
  TOP w0.508: R15.1 D1.2
$2N8889: length 1.5
  TOP w0.508: R16.1 D2.2
$2N9055: length 1.7
  TOP w0.508: R17.1 D3.2
$2N21881: length 5.7
  TOP w0.165: J2.20 62.87,51.39 61.34,52.91 J12.2
$2N21885: length 5.7
  TOP w0.165: J2.12 63.25,63.07 J12.6
$2N21890: length 5.7
  TOP w0.165: J2.4 63.8,71.71 62.28,73.23 J12.10
$2N21891: length 5.7
  TOP w0.165: J2.6 63.75,69.17 62.23,70.69 J12.9
$2N21896: length 5.1
  TOP w0.165: J13.2 J2.36
$2N21897: length 5.1
  TOP w0.165: J13.1 J2.38
$2N21900: length 5.1
  TOP w0.165: J13.7 J2.26
$2N38111: length 5.7
  TOP w0.165: J2.16 63.04,56.47 61.52,57.99 J12.4
$2N38156: length 5.7
  TOP w0.165: J12.3 61.27,55.45 62.79,53.93 J2.18
$3N899: length 5.8
  TOP w0.165: R26.1 R25.1 37.5,69.79 C11.1 39.97,69.79 R24.2 R27.1
$3N2104: length 1.8
  TOP w0.165: U5.2 35.68,64.55 36.2,65.07 R35.2
$3N2530: length 19.4
  TOP w0.165: U5.19 37.01,60.93 37.28,60.66 37.28,60.21 38.94,58.55 38.94,58.06 R28.1 39.27,57.22 39.48,57.01 42.29,57.01 42.42,57.13 44.96,57.13 R70.2
$3N2557: length 21.6
  TOP w0.165: R71.2 52.8,51.55 52.2,51.55 45.22,58.53 39.69,58.53 39.27,58.95 R29.1 38.7,59.42 37.8,60.32 37.8,61.16 37.53,61.43 U5.20
$3N2581: length 18.8
  TOP w0.165: U5.21 37.75,61.93 38.35,61.32 R30.1 39.27,60.62 39.58,60.31 45.47,60.31 51.84,53.94 R72.2
$3N2582: length 23.9
  TOP w0.165: U5.22 37.9,62.43 38.7,63.23 R31.1 39.27,62.45 39.51,62.21 45.44,62.21 54.4,53.25 54.96,53.25 R73.2
$3N2606: length 18.9
  TOP w0.165: R75.2 49.95,61.61 49.37,61.61 44.96,66.02 40.28,66.02 R33.1 38.98,66.75 38.98,65.18 37.23,63.43 U5.24
$3N2607: length 21.4
  TOP w0.165: R74.2 53.1,56.52 52.78,56.52 45.31,63.99 40.14,63.99 39.9,64.22 R32.1 39.26,64.77 37.43,62.93 U5.23
$3N12972: length 37.1
  TOP w0.165: v1(35.56,50.53) 37.57,48.52 46.2,48.52 53.72,41 R55.1 ; R56.2 24.77,52.38 27.32,49.83 C49.1 29.19,49.83 29.23,49.79 R53.2 R54.2 32.15,49.79 33.02,50.66 v1(33.02,51.16)
  BOTTOM w0.165: v1(33.02,51.16) 33.66,50.53 v1(35.56,50.53)
$3N18203: length 7.3
  TOP w0.165: U5.17 35.68,59.05 C7.1 36.68,56.72 R61.2 R60.1 38.15,56.57 38.79,55.92 Q1.1
$3N24833: length 2.4
  TOP w0.165: Q1.3 41.64,54.2 R67.1
$3N25249: length 1.4
  TOP w0.165: D4.1 R67.2

## Copper pours and planes (outline as drawn; the poured copper is in the pictures)
3V3 on TOP (solid shape): outline of 432 points within 5.08,24.44 59.64,62.83
5V on TOP (solid shape): 13.36,54.49 16.36,54.49 28.27,42.58 43.92,42.58 55.75,30.74 55.75,24.27 55.96,24.06 56.69,24.06 56.85,23.91 56.85,23.1 56.72,22.97 55.47,22.97 54.84,23.61 54.84,26.68 54.53,26.98 54.53,30.16 43.01,41.68 27.72,41.68 16.92,52.49 16.64,52.76 6.2,52.76 5.54,53.42 5.54,54.47 5.71,54.64 13.2,54.64
GND on TOP (solid shape): 49.63,61.05 49.63,60.85 49.31,60.53 49.13,60.53 45.46,64.2 40.45,64.2 40.41,64.24 40.41,65.81 44.87,65.81
GND on TOP (solid shape): 17.7,35.2 17.7,32.86 17.64,32.81 17.01,32.81 16.85,32.65 16.26,32.65 16.26,35.39 17.09,35.39 17.51,35.39
GND on TOP (solid shape): 27.74,55.15 27.74,52.13 28.22,51.65 28.91,51.65 28.98,51.57 28.98,50.86 28.88,50.76 27.1,50.76 25.68,52.18 25.68,55.08 25.93,55.33 27.56,55.33
GND on TOP (solid shape): 16.88,31.55 17.24,31.55 17.7,31.09 17.7,26.14 17.53,25.97 17.12,25.97 17.12,26.35 16.26,26.35 16.26,26.81 16.23,26.83 16.23,31.07 16.26,31.1 16.26,31.58 16.85,31.58
GND on TOP (solid shape): 17.58,72.86 38.68,72.86 39.18,72.36 39.18,71.51 39.19,71.5 39.19,70.82 39.12,70.74 36.83,70.74 36.58,70.48 36.58,66.84 36.53,66.79 35.48,66.79 35.28,66.99 35.28,68.08 35.08,68.28 33.91,68.28 33.81,68.39 33.81,69.6 33.66,69.76 32.84,69.76 31.37,71.23 17.5,71.23 16.74,71.99 14.27,71.99 14.12,72.14 14.12,72.78 14.4,73.06 17.37,73.06
GND on TOP (solid shape): 11.29,44.19 9.87,42.76 6.92,42.76 6.82,42.84 6.87,42.95 7.3,43.62 7.08,44.39 7.35,44.66 11.29,44.66
GND on TOP (solid shape): 64.05,57.53 64.3,57.53 64.4,57.45 64.34,57.33 64.02,57.08 63.84,56.71 63.83,56.68 63.13,56.68 61.61,58.2 60.57,58.2 60.56,58.23 60.44,58.49 60.25,58.7 60.21,58.81 60.31,58.88 62.7,58.88
GND on TOP (solid shape): 18.03,45.4 17.88,45.4 17.88,44.86 17.25,44.23 14.88,44.23 14.64,43.99 14.59,43.99 14.59,43.94 14.3,43.65 14.3,43.24 13.16,42.1 12.33,42.1 12.33,42.13 10.53,42.13 10.53,40.68 10.31,40.46 7.47,40.46 7.19,40.75 7.21,40.78 7.3,41.4 6.99,41.95 6.96,42.06 7.06,42.13 10.13,42.13 13.77,45.77 18.03,45.77
GND on TOP (solid shape): 33.12,65.03 33.17,65.03 33.43,64.78 33.43,64.59 33.22,64.38 33.04,64.38 32.74,64.68 32.74,64.93 32.49,65.19 31.42,65.19 31.31,65.08 31.24,65.08 31.04,64.88 31.04,63.94 31.45,63.53 31.54,63.53 31.57,63.51 31.85,63.51 32.3,63.05 33.3,63.05 33.3,63.05 33.58,63.05 33.66,63.13 33.66,63.45 36.2,63.45 36.2,60.91 33.66,60.91 33.66,61.65 33.68,61.67 33.68,62.63 33.66,62.65 33.66,62.67 33.5,62.82 33.48,62.82 33.4,62.91 31.77,62.91 31.39,63.29 31.1,63.29 30.86,63.53 30.1,63.53 30.02,63.61 29.41,63.61 29.11,63.31 25.14,63.31 25.12,63.31 24.82,63 24.82,62.98 24.74,62.9 24.74,60.94 25.14,60.53 29.39,60.53 29.62,60.31 29.62,59.27 28.55,58.2 25.73,58.2 24.27,59.66 24.27,64.1 25.56,65.39 32.76,65.39
GND on TOP (solid shape): 16.26,39.86 16.43,39.86 16.94,39.35 16.94,38.4 16.89,38.35 14.86,38.35 14.24,37.73 13.56,37.73 12.35,36.53 12.25,36.53 12.23,36.56 11.41,37.05 10.61,36.53 7.24,36.53 7.08,36.78 6.85,36.97 6.8,37.09 6.9,37.16 12.49,37.16 15.12,39.78 15.77,39.78 15.77,39.86 16,39.86 16.03,39.89 16.23,39.89
GND on TOP (solid shape): 14.48,28.56 14.59,28.58 14.66,28.49 14.66,28.06 14.07,27.47 6.82,27.47 6.72,27.54 6.77,27.66 7.1,27.91 7.28,28.28 7.29,28.32 10.55,28.32 10.56,28.28 11.43,27.62 12.3,28.28 12.31,28.32 14.24,28.32
GND on TOP (solid shape): 10.19,39.15 10.53,38.8 10.53,38.78 11.24,37.8 12.28,38.4 12.3,38.43 12.41,38.43 12.82,38.83 12.82,39.19 13,39.38 13.75,39.38 13.84,39.32 13.82,39.21 12.28,37.67 6.9,37.67 6.8,37.75 6.85,37.86 7.28,38.42 7.21,39.13 7.19,39.17 7.47,39.45 10.19,39.45
GND on TOP (solid shape): 53.39,66.03 54.18,66.03 54.18,66.02 55.14,66.02 55.14,66.03 55.83,66.03 55.83,66.42 59.09,66.42 59.15,66.4 59.18,66.35 59.69,64.7 60.2,66.35 60.23,66.4 60.29,66.42 60.87,66.42 62.14,65.15 64.3,65.15 64.4,65.07 64.34,64.95 63.88,64.46 63.86,63.77 63.81,63.65 63.69,63.67 63.06,64.3 55.83,64.3 55.83,64.68 54.86,64.68 54.86,64.68 54.36,64.68 54.36,64.68 53.39,64.68 53.39,64.3 53.05,64.3 52.77,64.49 52.45,64.4 52.34,64.39 52.28,64.48 52.28,66.32 52.38,66.42 53.39,66.42
GND on TOP (solid shape): 43.4,70.91 43.5,70.89 46.63,67.77 53.39,67.77 53.39,67.35 54.36,67.35 54.36,67.36 54.86,67.36 54.86,67.35 55.83,67.35 55.83,67.77 58.87,67.77 59.69,67.24 60.51,67.77 61.82,67.77 63.34,66.24 63.88,66.24 64.07,65.96 64.35,65.76 64.4,65.64 64.3,65.57 62.32,65.57 61.05,66.84 55.83,66.84 55.83,67.22 54.86,67.22 54.86,67.22 54.36,67.22 54.36,67.22 53.39,67.22 53.39,66.84 52.21,66.84 51.86,66.49 51.86,61.38 52.77,60.48 53.39,60.48 53.39,60.09 54.1,60.09 54.1,60.08 55.09,60.08 55.09,60.09 55.83,60.09 55.83,60.32 58.81,60.32 58.82,60.3 59.69,59.62 60.56,60.3 60.57,60.32 63.16,60.32 63.95,59.52 63.84,58.74 64.34,58.14 64.4,58.02 64.3,57.95 64.22,57.95 62.87,59.3 58.56,59.3 58.15,58.88 54.36,58.88 54.27,58.94 54.28,59.05 54.21,59.65 53.63,59.53 53.13,59.53 50.62,62.03 49.25,62.03 45.04,66.23 40.41,66.23 40.41,68.35 40.89,68.83 42.93,68.83 42.93,70.46 42.97,70.46 43.22,70.58 43.33,70.83
GND on TOP (solid shape): outline of 1125 points within 2.18,22.91 14.66,42.13
GND on TOP (solid shape): outline of 6584 points within 0.51,10.64 70.61,76.28
GND on BOTTOM (solid shape): outline of 10165 points within 0.51,10.64 70.61,76.28
VIN on TOP (solid shape): 29.22,62.91 31.23,62.91 31.61,62.53 33.24,62.53 33.3,62.47 33.3,62.33 32.36,62.33 32.36,62.04 33.3,62.04 33.3,61.83 33.27,61.81 30.36,61.81 29.46,60.91 25.3,60.91 25.12,61.1 25.12,62.75 25.3,62.92 29.21,62.92
VIN on TOP (solid shape): outline of 197 points within 5.46,17.05 30.86,48.21
VIN on BOTTOM (solid shape): 27.08,62.82 27.08,61.38 22.5,56.8 22.5,45.14 21.92,44.56 20.14,44.56 19.84,44.87 19.84,57.46 25.32,62.95 26.95,62.95
OUTU on TOP (solid shape): 36.73,39.91 36.73,21.7 37.99,20.44 37.99,16.94 37.87,16.82 35.89,16.82 35.79,16.93 35.79,39.86 35.94,40.01 36.63,40.01
OUTU on BOTTOM (solid shape): 32.51,64.65 32.51,63.92 32.41,63.81 31.67,63.81 31.19,63.33 31.19,62.34 29.25,60.4 29.25,50.14 36.73,42.66 36.73,38.29 36.47,38.03 35.94,38.03 35.79,38.18 35.79,42.17 28.3,49.67 28.3,61.3 30.05,63.05 30.05,63.56 31.42,64.93 32.23,64.93
OUTV on TOP (solid shape): 41.86,37.17 41.86,17.13 41.61,16.87 39.65,16.87 39.52,17 39.52,22.26 40.49,23.22 40.49,37.14 40.78,37.44 41.59,37.44
OUTV on TOP (solid shape): 33.27,61.53 33.27,61.35 33.22,61.3 31.45,61.3 30.94,60.79 30.94,59.77 30.73,59.57 30.25,59.57 30.18,59.65 30.18,60.94 30.78,61.55 33.25,61.55
OUTV on BOTTOM (solid shape): 30.84,60.74 30.84,50.6 41.88,39.55 41.88,35.52 41.71,35.34 40.69,35.34 40.46,35.57 40.46,39.65 35.16,44.95 35.1,45.02 29.78,50.34 29.78,60.35 30.35,60.92 30.66,60.92
OUTW on TOP (solid shape): 33.2,60.99 33.2,60.89 33.12,60.82 32.23,60.82 32.05,60.64 32.05,59.55 31.98,59.47 31.6,59.47 31.45,59.62 31.45,60.79 31.7,61.04 33.15,61.04
OUTW on TOP (solid shape): 44.81,37.17 44.81,21.85 45.39,21.27 45.43,21.23 45.43,21.2 45.45,21.18 45.45,17.11 45.14,16.8 43.59,16.8 43.36,17.03 43.36,22.59 43.71,22.94 43.71,37.19 44.02,37.5 44.48,37.5
OUTW on BOTTOM (solid shape): 32.13,60.84 32.13,50.96 36.72,46.37 37.01,46.09 44.86,38.24 44.86,35.8 44.65,35.59 43.79,35.59 43.69,35.7 43.69,38.18 31.37,50.5 31.37,60.87 31.6,61.1 31.88,61.1
SENSEU on TOP (solid shape): 33.45,69.25 33.45,66.73 33.81,66.38 33.81,65.62 34.3,65.13 34.3,63.95 34.24,63.89 34.11,63.89 34.06,63.94 34.06,64.6 33.38,65.29 33.22,65.29 32.87,65.64 25.45,65.64 24.02,64.21 24.02,59.48 25.86,57.64 25.86,56.04 25.81,55.99 24.61,55.99 22.25,58.35 22.25,65.01 23.85,66.61 31.8,66.61 32.11,66.91 32.11,69.33 32.16,69.38 33.32,69.38
SENSEV on TOP (solid shape): 33.78,60.51 33.78,59.7 32.41,58.33 30.81,58.33 30.48,58 30.48,52.89 30.25,52.66 30.25,52.64 30.15,52.54 29.36,52.54 29.13,52.76 29.13,55.58 28.68,56.04 27.46,56.04 27.29,56.21 27.29,57.55 27.46,57.72 28.42,57.72 29.87,59.17 32.11,59.17 32.85,59.91 33.44,59.91 33.55,60.03 33.55,60.51 33.58,60.54 33.76,60.54
SENSEW on TOP (solid shape): 34.29,60.49 34.29,59.42 34.29,59.42 34.27,59.29 34.29,59.17 34.29,59.16 34.29,58.63 33.25,57.59 33.25,56.04 32.36,55.15 32.36,52.69 32.16,52.49 31.22,52.49 30.85,52.85 30.85,55.16 31.83,56.14 31.83,57.49 32.41,58.07 32.52,58.07 34.04,59.59 34.04,59.7 34.06,59.72 34.06,60.49 34.09,60.51 34.26,60.51
$2N5859 on TOP (solid shape): 58.65,23.81 61.44,23.81 61.5,23.74 66.35,23.74 68.66,21.44 68.66,17.08 68.33,16.75 65.86,16.75 65.63,16.98 65.63,20.74 64.26,22.11 60.05,22.11 59.36,22.79 57.76,22.79 57.56,23 57.56,23.91 57.61,23.96 58.5,23.96

## Text on the board
User.Comments: SPELL MODE: 1X2 | ECBMCU105H VER.A SILKSCREEN TOP | A | B | C | D | E | F | 1 | 2 | 3 | 4 | 5 | 6
Ref Des/Silkscreen Top: 14 | 20 | 24 | 40 | 36 | 10 | 32 | 28 | 6 | 2 | J1 | 35 | 13 | 23 | 9 | 19 | 39 | 1 | SPD | 27 | 31 | 5 | VIN | GND | U | V | W | H3/Z+ | H2/B+ | H1/A+ | J2 | VCC
DIMENSION: 1.  STACKING (dielectric thickness can be adjusted beween +/-2mil. | 2.  Control Impedance (track width can be adjusted +/-0.5mil , but don,t less than 4mil.) | 3.  This board must be used lead-free. | REF LAYER | Via  Technic: | Spell Mode: | Compare With IPC File: | Silkscreen Colours: | Dielectric Material: | Soldermask Colours: | Surface Finished: | Finger Chamfer: | 2 X 2 | FR4  TG>150 C | HASL Lead Free | Yes | Green | White | All via (<=0.5mm) must be filled with Resin | HASL | All via (<=0.5mm) must be filled with green soldermask(except open soldermask via) | Angle | Board Thickness(MM): | 20 | Immersion Tin | Yellow | Flash Gold | Blue | No | Open Windows: | Matte Green | Black | Immersion Gold (ENIG) | Immersion Silver | 30 | 1.6 | +/-10% | All via (<=0.127mm) must be filled with POFV | 0 | Layers: | Gold Finger | Other | 45 | 2 | OSP | By gerber | ENEPIG | 57.68MIL | Purchase   Order &  Specification   Sheet | 0.5OZ+Plating | B | CORE | TOP | BOTTOM | Board Name: | ECBMOTORA VER.B | A | C | D | E | F | 1 | 3 | 4 | 5 | 6
DEVICE_TYPE_BOTTOM: FIGURE | SIZE | 10.0 | 32.0 | 36.0 | 44.0 | 55.0 | 100.0 | 100.0x32.0 | 110.0x32.0 | 120.0x32.0 | DRILL CHART: TOP to BOTTOM | ALL UNITS ARE IN MILS | PLATED | NON-PLATED | QTY | 639 | 3 | 34 | 80 | 10 | 4 | 1
